# Altium PCB GLCD-ENCODER.PcbDoc
Units mm, origin at the board's own origin, x right, y up, seen from the top; angles counter-clockwise.
Board outline 112.6 x 71.2 mm, 2 copper layers (Top Layer, Bottom Layer); 47 components, 41 nets, 180 pads, 16 vias.
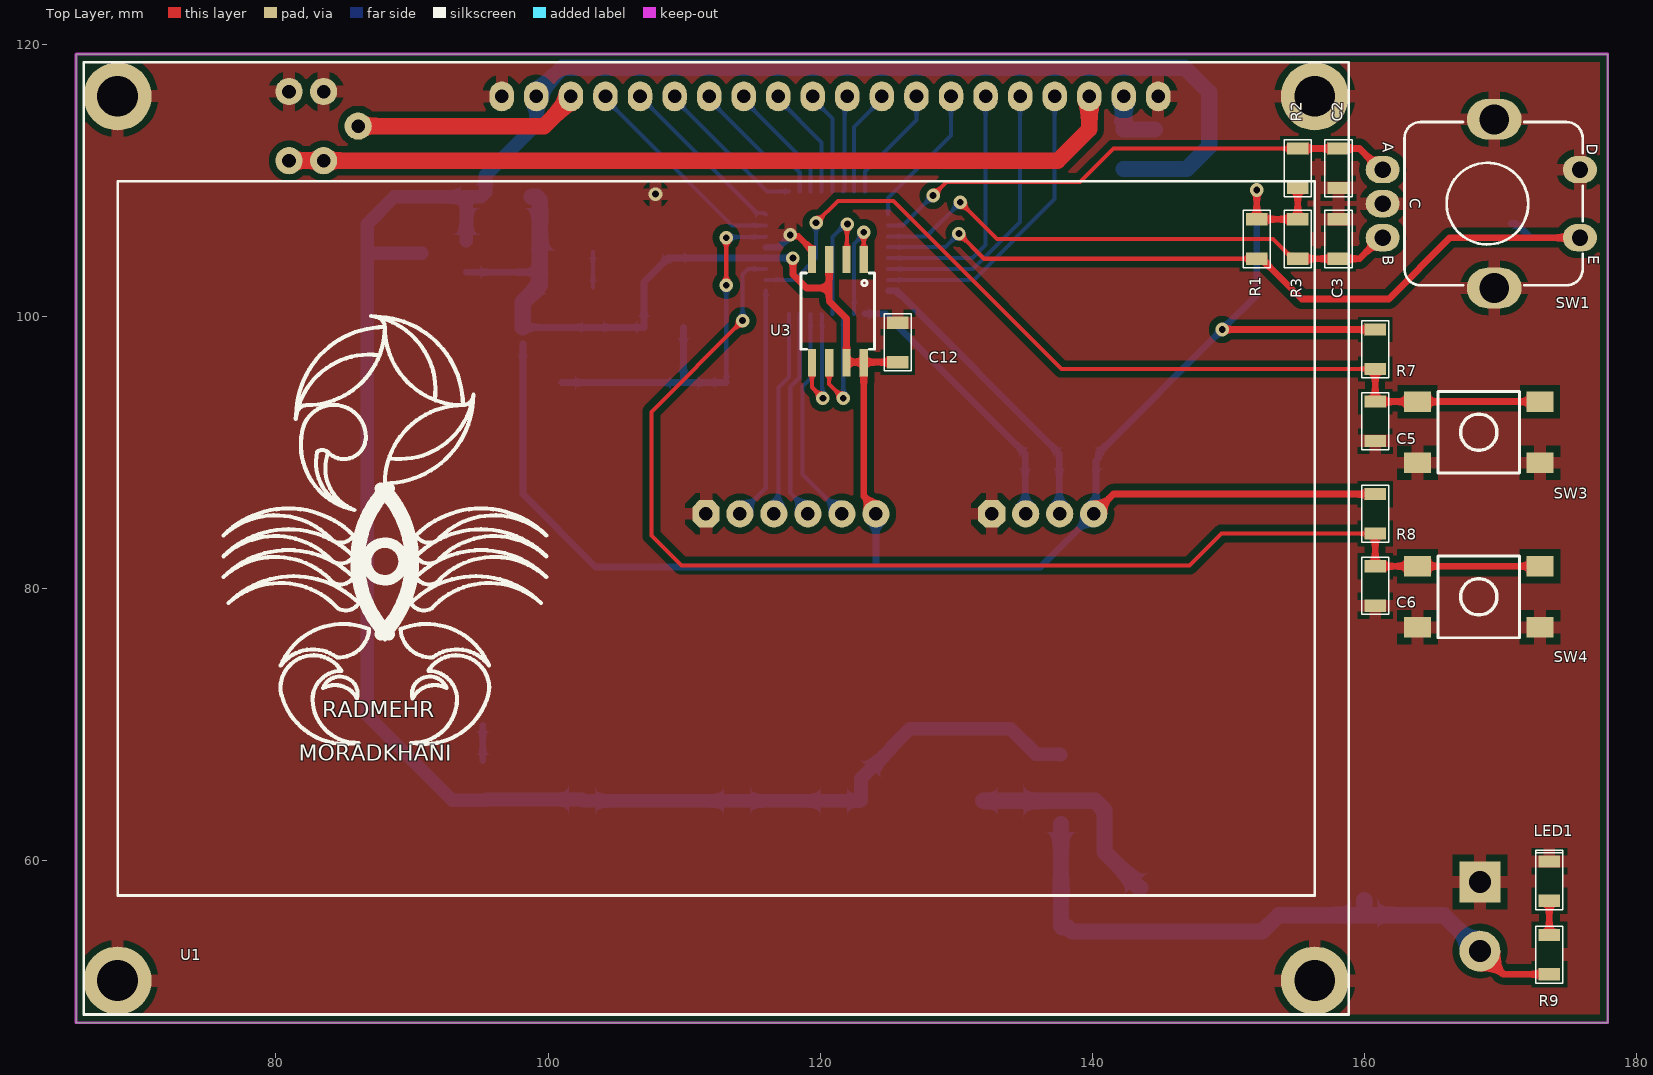
[diagram p0: Top Layer view]
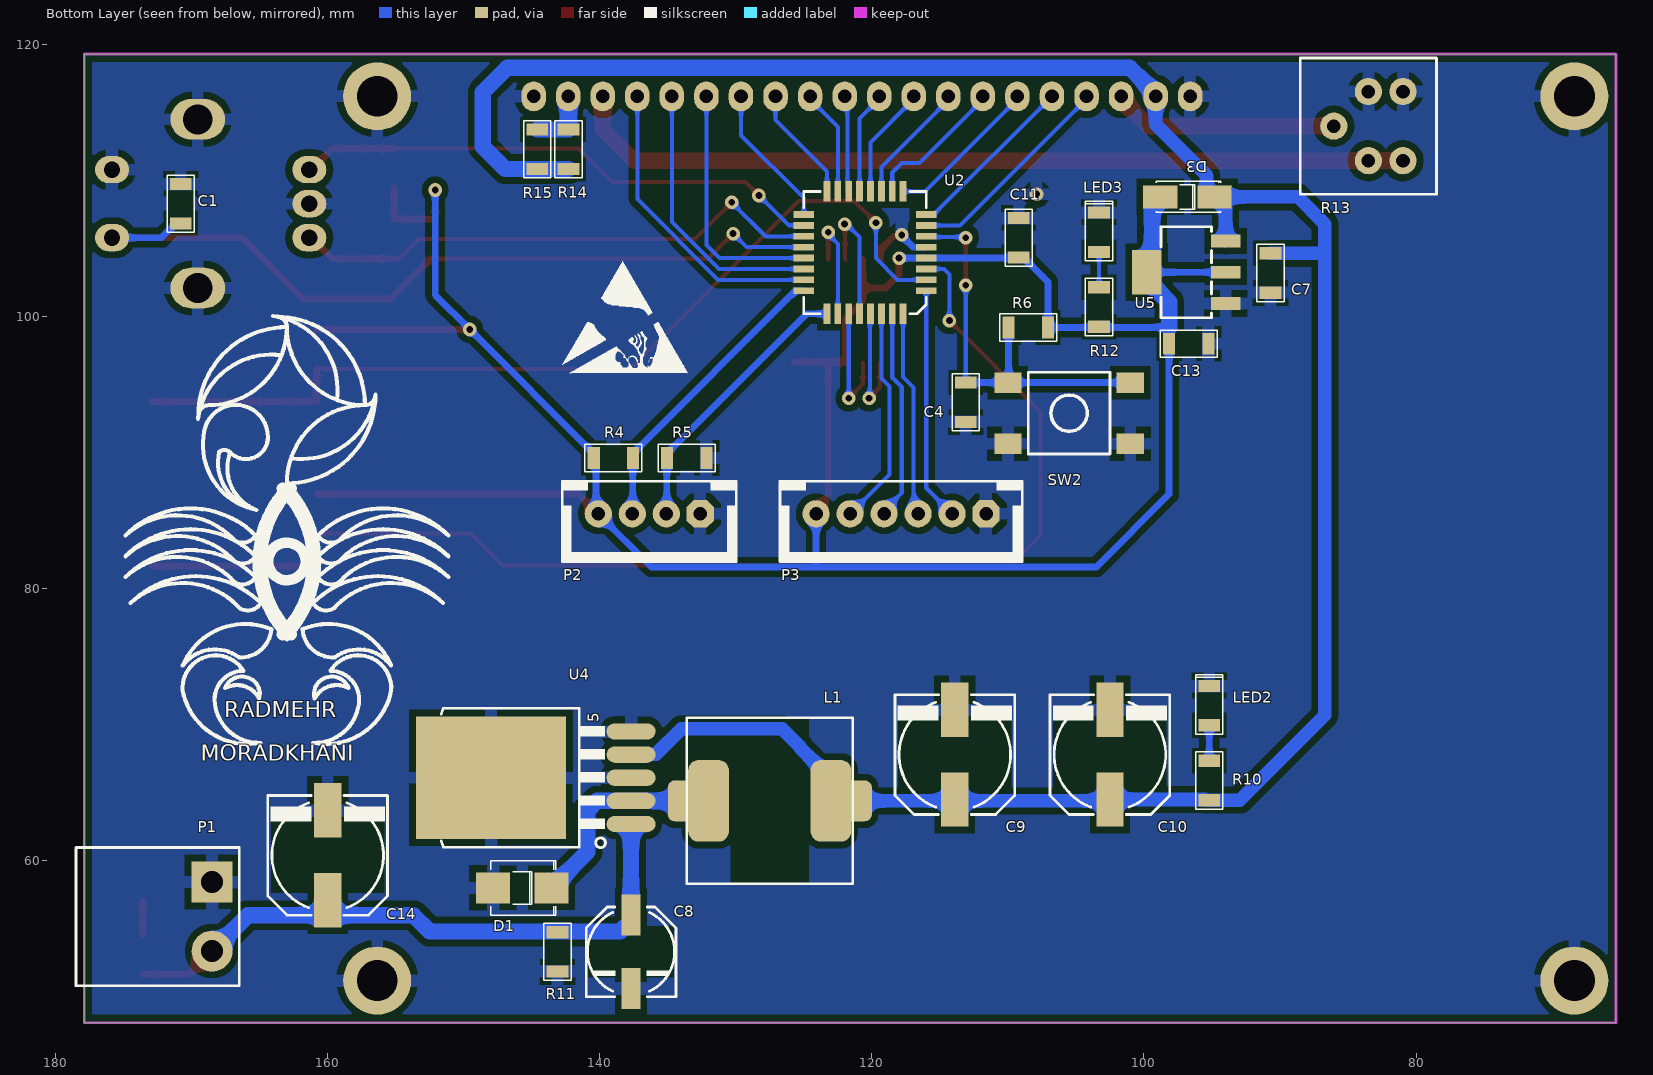
[diagram p1: Bottom Layer view, seen from below]
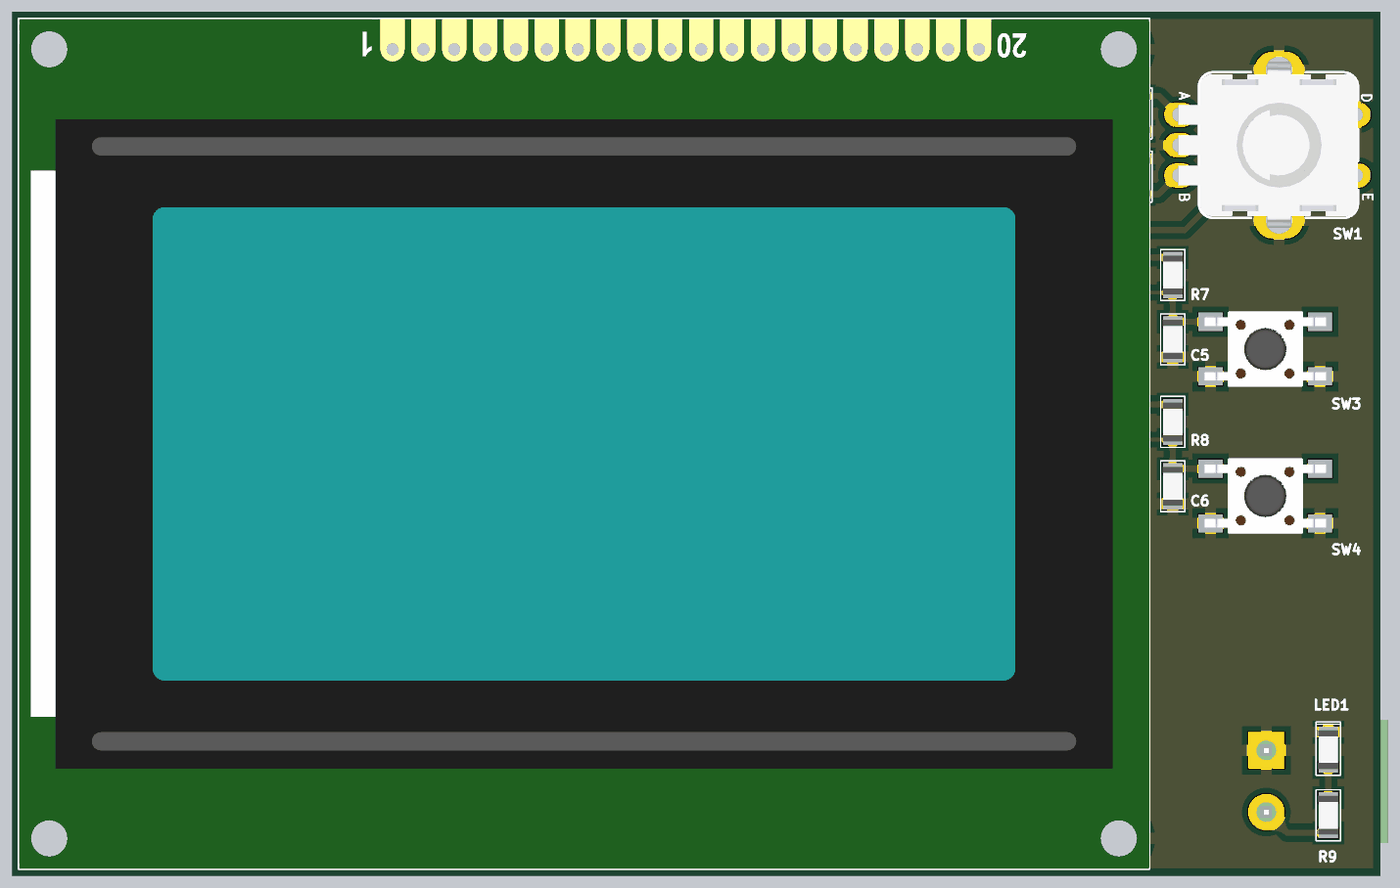
[diagram p2: 3D render of the assembled board from above, using the file's embedded part models]
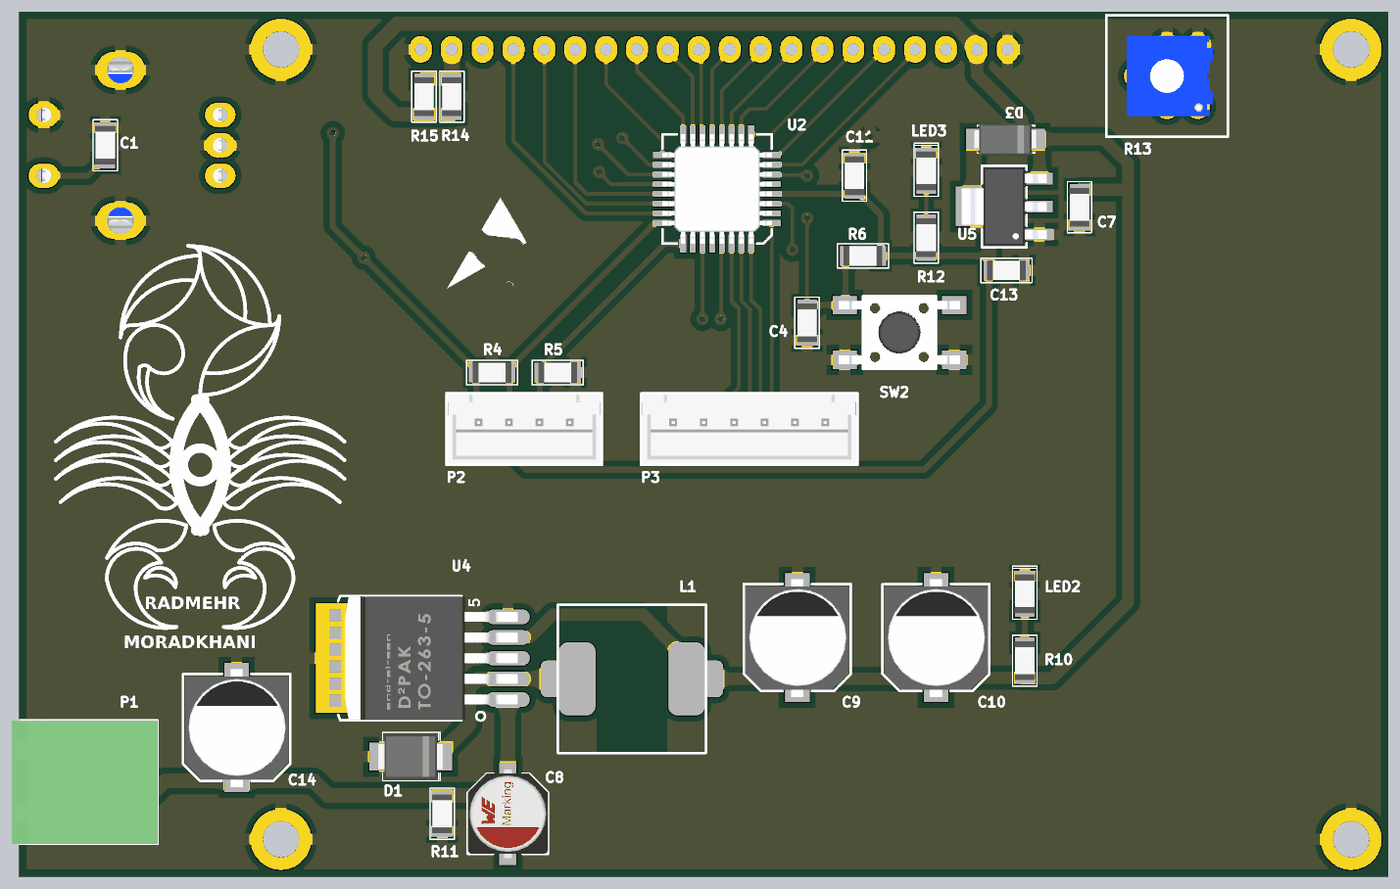
[diagram p3: 3D render of the assembled board from below, using the file's embedded part models]

## Layer stack, top to bottom
Top Solder: solder mask 0.0102, Solder Resist, Dk 3.5
Top Layer: signal copper 0.0356
Dielectric 1: dielectric 0.32, FR-4, Dk 4.8
Bottom Layer: signal copper 0.0356
Bottom Solder: solder mask 0.0102, Solder Resist, Dk 3.5

## Board outline
65.3,48.1 65.3,119.3 177.9,119.3 177.9,48.1

## Design rules (kind name [scope] priority, off if disabled: settings)
Clearance "Stitching GND" [IsStitchingVia and InNet('GND') vs (IsVia and (Not IsStitchingVia)) Or IsPad] p1: gap=0.127 ignorepadtopadclearanceinfootprint=FALSE
Clearance [All] p2: gap=0.3 ignorepadtopadclearanceinfootprint=FALSE except(0: Arc-Hole Track-Hole SMDPad-Hole THPad-Hole Via-Hole Fill-Hole Poly-Hole Region-Hole Text-Hole; 0.5: Arc-Poly Track-Poly SMDPad-Poly THPad-Poly Via-Poly Fill-Poly Poly-Poly)
PlaneClearance [All] p1: clearance=0.5
PlaneConnect [All] p1: planeconnectstyle=Relief reliefexpansion=0.9 reliefentries=4 reliefconductorwidth=0.9 reliefairgap=0.5
PolygonConnect [All] p1: connectstyle=Relief reliefconductorwidth=0.9 reliefentries=4 polygonreliefangle="90 Angle" airgapwidth=0.5
RoutingVias [All] p1: holewidth=0.5 width=1 viastyle="Through Hole" minholewidth=0.5 minwidth=1 maxholewidth=0.5 maxwidth=1
SolderMaskExpansion [All] p1: expansion=0.102 istentingtop=FALSE
Width [All] p1: maxlimit=1.2 minlimit=0.3 preferedwidth=0.5 minimp=50.000000 maximp=50.000000 favimp=50.000000
28 further rules are at their usual default settings.

## Components (designator, comment, footprint, x,y, rotation, side; value= is the part's Value field where it differs from the comment)
C1 "CAP_SMD" "C 1206" 170.8,108.3 r270 bottom
C2 "CAP_SMD" "C 1206" 158.1,110.9 r90 top
C3 "CAP_SMD" "C 1206" 158.1,105.7 r270 top
C4 "CAP_SMD" "C 1206" 113.1,93.7 r90 bottom
C5 "CAP_SMD" "C 1206" 160.8,92.3 r90 top
C6 "CAP_SMD" "C 1206" 160.8,80.2 r90 top
C7 "CAP_SMD" "C 1206" 90.7,103.2 r90 bottom
C8 "CAP_POL" CAP_EL_100uF 137.7,53.3 r270 bottom
C9 "CAP_POL" CAP_EL_470uF 113.9,67.8 r90 bottom
C10 "CAP_POL" CAP_EL_470uF 102.5,67.8 r90 bottom
C11 "CAP_SMD" "C 1206" 109.2,105.8 r270 bottom
C12 "CAP_SMD" "C 1206" 125.7,98.1 r270 top
C13 "CAP_SMD" "C 1206" 96.7,98 r0 bottom
C14 "CAP_POL" CAP_EL_470uF 160,60.4 r90 bottom
D1 "DIOD_SMD" DIOD_SMB 145.7,58 r180 bottom
D3 "DIOD_SMD" DIOD_SMA 96.8,108.8 r180 bottom
L1 "Inductor" L_12*12_SMD 127.5,64.4 r180 bottom
LED1 "LED_SMD" "D 1206" 173.6,58.5 r90 top
LED2 "LED_SMD" "D 1206" 95.2,71.4 r90 bottom
LED3 "LED_SMD" "D 1206" 103.3,106.2 r90 bottom
P1 "POENIX" POENIX_R_2pin 168.5,55.9 r270 bottom
P2 "HHDR_4" XH_4 136.36,85.5 r0 bottom
P3 "XH_6" XH_6 117.85,85.5 r0 bottom
R1 "RES_SMD" "R 1206" 152.1,105.7 r270 top
R2 "RES_SMD" "R 1206" 155.1,110.9 r90 top
R3 "RES_SMD" "R 1206" 155.1,105.7 r270 top
R4 "RES_SMD" "R 1206" 139,89.6 r0 bottom
R5 "RES_SMD" "R 1206" 133.6,89.6 r0 bottom
R6 "RES_SMD" "R 1206" 108.5,99.2 r180 bottom
R7 "RES_SMD" "R 1206" 160.8,97.6 r90 top
R8 "RES_SMD" "R 1206" 160.8,85.5 r90 top
R9 "RES_SMD" "R 1206" 173.6,53.1 r90 top
R10 "RES_SMD" "R 1206" 95.2,65.9 r270 bottom
R11 "RES_SMD" "R 1206" 143.1,53.3 r90 bottom
R12 "RES_SMD" "R 1206" 103.3,100.7 r270 bottom
R13 "POT" POT_DIP_GFP_1&2 83.5,114 r90 bottom
R14 "RES_SMD" "R 1206" 142.3,112.3 r90 bottom
R15 "RES_SMD" "R 1206" 144.6,112.3 r90 bottom
SW1 "Rotary_Encoder" Rotary_Encoder 168.6,108.3 r0 top
SW2 "SWITCH" SOP4 105.5,92.9 r0 bottom
SW3 "SWITCH" SOP4 168.415,91.5 r180 top
SW4 "SWITCH" SOP4 168.415,79.4 r180 top
U1 "KS0108-128*64" KS0108-128*64_Module 156.36,116.19 r90 top locked
U2 "STM32G030K6" LQFP32 120.5,104.7 r0 bottom
U3 "W25QXXX" SOIC-8-WIDE 121.3,100.4 r270 top
U4 "LM2576" TO-263-5-SMD 137.7,66.1 r90 bottom
U5 "AMS1117" SOT-223 96.89,103.26 r90 bottom

## Footprints (in the part's own frame and the unit in brackets; to place one, negate y for a bottom-side part, rotate by r counter-clockwise, add the part's x,y. Pads: shape width x height; smd on the part's side, far side on the other; paste and mask are expansions set on the pad)
"C 1206" [mm] "C?"
  rect 0.9x1.6 smd: 1(-1.45,0) 2(1.45,0)
  Top Layer pour cut-out: -0.9,0.95 0.9,0.95 0.9,-0.95 -0.9,-0.95
  silkscreen extent -2.1,-1 2.1,1, body extent -1.6,-0.83 1.6,0.83, height 0.57
CAP_EL_100uF [mm] "C?"
  rect 3x1.4 smd: 1(2.7,0) 2(-2.7,0)
  Top Layer pour cut-out: 1.905,3.175 1.905,-3.175 -1.905,-3.175 -1.905,3.175
  silkscreen extent -3.3,-3.3 3.3,3.3, body extent -3.65,-3.3 3.65,3.3, height 5.8
CAP_EL_470uF [mm] "C?"
  rect 4x2 smd: 1(3.3,0) 2(-3.3,0)
  Top Layer pour cut-out: 2.794,4.191 2.794,-4.191 -2.794,-4.191 -2.794,4.191
  silkscreen extent -4.4,-4.4 4.4,4.4, body extent -4.9,-4.25 4.8,4.25, height 10.3
"D 1206" [mm] "D?"
  rect 0.9x1.6 smd: 1(-1.45,0) 2(1.45,0)
  Top Layer pour cut-out: -0.9,0.95 0.9,0.95 0.9,-0.95 -0.9,-0.95
  silkscreen extent -2.1,-1 2.28,1, body extent -1.6,-0.83 1.6,0.83, height 0.57
DIOD_SMA [mm] "D?"
  rect 2.5x1.7 smd: 1(-2,0) 2(2,0)
  Top Layer pour cut-out: -0.65,0.95 0.65,0.95 0.65,-0.95 -0.65,-0.95
  silkscreen extent -2.3,-1.15 2.45,1.15, body extent -2.6,-1.3 2.6,1.3, height 2.42
DIOD_SMB [mm] "D?"
  rect 2.5x2.3 smd: 1(-2.15,0) 2(2.15,0)
  Top Layer pour cut-out: -0.8,1.25 0.8,1.25 0.8,-1.25 -0.8,-1.25
  silkscreen extent -2.3,-2 2.45,2, body extent -2.7,-1.8 2.7,1.8, height 2.32
KS0108-128*64_Module [mm] "U?"
  oval 2.2x1.8 hole 1: 1(0,59.76) 2(0,57.22) 3(0,54.68) 4(0,52.14) 5(0,49.6) 6(0,47.06) 7(0,44.52) 8(0,41.98) 9(0,39.44) 10(0,36.9) 11(0,34.36) 12(0,31.82) 13(0,29.28) 14(0,26.74) 15(0,24.2) 16(0,21.66) 17(0,19.12) 18(0,16.58) 19(0,14.04) 20(0,11.5)
  round 5 hole 3: 21(0,0) 22(-65,0) 23(-65,88) 24(0,88)
  silkscreen extent -67.5,-2.5 2.5,90.5, body extent -67.5,-2.5 2.5,90.5, height 20.6
L_12*12_SMD [mm] "L?"
  rrect50% 2x3 smd: 1(-6.5,0) 2(6.5,0)
  rrect50% 3x6 smd: 1(-4.5,0) 2(4.5,0)
  Top Layer pour cut-out: -2.9,6.2 2.9,6.2 2.9,-6.2 -2.9,-6.2
  silkscreen extent -6.1,-6.1 6.1,6.1
LQFP32 [mm] "U?"
  rect 1.5x0.5 smd mask+0.06: 1(-4.5,2.8) 2(-4.5,2) 3(-4.5,1.2) 4(-4.5,0.4) 5(-4.5,-0.4) 6(-4.5,-1.2) 7(-4.5,-2) 8(-4.5,-2.8) 17(4.5,-2.8) 18(4.5,-2) 19(4.5,-1.2) 20(4.5,-0.4) 21(4.5,0.4) 22(4.5,1.2) 23(4.5,2) 24(4.5,2.8)
  rect 0.5x1.5 smd mask+0.06: 9(-2.8,-4.5) 10(-2,-4.5) 11(-1.2,-4.5) 12(-0.4,-4.5) 13(0.4,-4.5) 14(1.2,-4.5) 15(2,-4.5) 16(2.8,-4.5) 25(2.8,4.5) 26(2,4.5) 27(1.2,4.5) 28(0.4,4.5) 29(-0.4,4.5) 30(-1.2,4.5) 31(-2,4.5) 32(-2.8,4.5)
  silkscreen extent -4.5,-4.5 4.5,4.5, body extent -4.5,-4.5 4.5,4.5, height 1.6
POENIX_R_2pin [mm] "P?"
  rect 3x3 hole 1.6: 1(-2.54,0)
  round 3 hole 1.6: 2(2.54,0)
  silkscreen extent -5.08,-10 5.08,2, body extent -5.08,-10 5.08,2, height 8.55
POT_DIP_GFP_1&2 [mm] "R?"
  round 2 hole 1: 1(-2.54,-2.54) 1(-2.54,0) 2(0,2.54) 3(2.54,-2.54) 3(2.54,0)
  silkscreen extent -5,-5 5,5, body extent -3.3,-3.75 3.3,3.3, height 4.7
"R 1206" [mm] "R?"
  rect 0.9x1.6 smd: 1(-1.45,0) 2(1.45,0)
  Top Layer pour cut-out: -0.9,0.95 0.9,0.95 0.9,-0.95 -0.9,-0.95
  silkscreen extent -2.1,-1 2.1,1, body extent -1.6,-0.83 1.6,0.83, height 0.57
Rotary_Encoder [mm] "SW?"
  oval 2.5x2 hole 1.2: 1(-7.25,2.5) 2(-7.25,0) 3(-7.25,-2.5) 4(7.25,-2.5) 5(7.25,2.5)
  oval 4x3 hole 2.2: 6(0.95,6.2)
  oval 4x3 hole 2.2 unplated: 7(0.95,-6.2)
  silkscreen extent -5.65,-6 7.45,6, body extent -7.38,-6.81 7.45,6.84, height 21.2
SOIC-8-WIDE [mm] "U?"
  rect 2x0.6 smd: 1(-3.8,1.905) 2(-3.8,0.635) 3(-3.8,-0.635) 4(-3.8,-1.905) 5(3.8,-1.905) 6(3.8,-0.635) 7(3.8,0.635) 8(3.8,1.905)
  silkscreen extent -2.8,-2.7 2.8,2.7, body extent -4.05,-2.73 4.05,2.73, height 1.75
SOP4 [mm] "S?"
  rect 2x1.5 smd: 1(-4.5,2.25) 2(-4.5,-2.25) 3(4.5,-2.25) 4(4.5,2.25)
  silkscreen extent -3,-3 3,3, body extent -5,-3 5,3, height 7.27
SOT-223 [mm] "U?"
  rect 0.95x2.15 smd: 1(-2.3,-2.9) 2(0,-2.9) 3(2.3,-2.9)
  rect 3.255x2.15 smd: 4(0,2.9)
  silkscreen extent -3.35,-1.85 3.35,1.85, body extent -3.25,-3.5 3.25,3.5, height 1.8
TO-263-5-SMD [mm] "U?"
  oval 1.2x3.6 smd: 1(-3.404,0) 2(-1.702,0) 3(0,0) 4(1.702,0) 5(3.404,0)
  rect 9x11 smd paste-6: 6(0,10.3)
  silkscreen extent -5.14,1.88 5.1,13.96, body extent -5.08,-0.84 5.08,13.39, height 4.87
XH_4 [mm] "PW10-xx-M, JST-BxB-XH-A pitch: 2.5mm"
  oct 2x2 hole 1: 1(-3.75,0)
  round 2 hole 1: 2(-1.25,0) 3(1.25,0) 4(3.75,0)
  silkscreen extent -6.4,-2.4 6.4,3.5, body extent -6.25,-2.3 6.25,3.4, height 7
XH_6 [mm] "PW10-xx-M, JST-BxB-XH-A pitch: 2.5mm"
  oct 2x2 hole 1: 1(-6.25,0)
  round 2 hole 1: 2(-3.75,0) 3(-1.25,0) 4(1.25,0) 5(3.75,0) 6(6.25,0)
  silkscreen extent -8.9,-2.4 8.9,3.5, body extent -8.75,-2.3 8.75,3.4, height 7

## Part data
P1: library part POENIX_2PIN_5.08mm_1
P2: library part XH_4, "JST-XH pitch: 2.5mm"
P3: "JST-XH pitch: 2.5mm", MANF=JST, MANF_P#=JST-S6B-XHA
R13: library part POTENTIOMETR

## Via types
v1: diameter 1, hole 0.5, Top Layer to Bottom Layer, tented both sides, 16 vias

## Nets (pads, with @x,y where several pads share a name; then routed paths per layer and width w, separated by ;. In a path a pad name is that pad's centre, name@x,y a point inside that pad or via, vN(x,y) a via of type N, cw(c..) or ccw(c..) an arc to the next point about the centre after c; other vN are vias at no path point)
+3.3V: C11.2 C12.2 C13.2 D3.1 P2.4 P3.6 R1.1 R2.1 R3.1 R4.2 R6.2 R7.2 R8.2 R12.2 U2.4 U3.3 U3.7 U3.8 U5.2 U5.4 | length 197.6
  Top Layer w0.5: v1(118,104.3) 118,103.093 118.993,102.1 120.665,102.1 ; U3.3 120.665,102.1 ; P3.6 124.1,85.906 123.205,86.801 U3.8 U3.8@123.255,96.65 ; C12.2 U3.8@123.255,96.65 ; P2.4 141.56,86.95 R8.2 ; v1(149.55,99.05) R7.2 ; v1(152.1,109.3) R1.1 R3.1 R2.1 ; 120.665,102.1 120.665,101.135 121.935,99.865 U3.7 121.985,96.65 U3.8@123.255,96.65
  Bottom Layer w0.5: U5.2 99.4,103.26 U5.4 ; C13.2 98.15,86.943 103.493,81.6 136.21,81.6 P2.4 140.28,85.67 140.28,89.43 R4.2 140.45,89.95 v1(149.55,99.05) ; 98.15,99.2 R6.2 107.05,102.55 108.8,104.3 U2.4 v1(118,104.3) ; 124.1,81.7 P3.6 P3.6@124.1,85.6 ; v1@149.5,99.1 v1(149.55,99.05) ; v1(152.1,109.3) 152.1,101.6 v1(149.55,99.05)
  Bottom Layer w1.2: 98.15,99.2 98.15,101.068 99.4,102.317 99.4,103.26 99.4,108.55 99.15,108.8 D3.1
+5V: C7.2 C9.2 C10.2 D3.2 L1.2 R10.2 R14.1 R15.1 U1.2 U4.4 U5.3 | length 181.7
  Bottom Layer w1: C7.2 87.05,104.65 86.7,104.3 ; U5.3 93.99,108.39 D3.2@94.4,108.8 ; U1.2 99.14,114.14 95.411,110.411 95.411,109.15 95.061,108.8 D3.2@94.4,108.8 ; U4.4 137.662,67.84 135.86,67.84 134,69.7 126.6,69.7 125.26,68.36 125.26,68.295 123,66.035 123,64.4 121,64.4 102.6,64.4 C10.2 95.5,64.5 95.45,64.45 R10.2 92.95,64.45 86.7,70.7 86.7,104.3 ; 86.7,104.3 86.7,106.8 88.7,108.8 D3.2@94.4,108.8
  Bottom Layer w1.2: U1.2 99.333,116.383 99.333,116.589 101.044,118.3 146.8,118.3 148.6,116.5 148.6,112.5 146.95,110.85 R14.1
CS1: U1.15 U2.21 | length 18.5
  Bottom Layer w0.3: U2.21 131.2,104.3 132.16,105.26 U1.15
CS2: U1.16 U2.22 | length 20.4
  Bottom Layer w0.3: U2.22 131.249,103.5 134.7,106.951 U1.16
D0: U1.7 U2.10 | length 10.5
  Bottom Layer w0.3: U1.7 111.84,115.96 116.5,111.3 117.8,111.3 118.5,110.6 U2.10
D1: U1.8 U2.11 | length 9
  Bottom Layer w0.3: U1.8 114.38,115.92 119.3,111 U2.11
D2: U1.9 U2.12 | length 8.3
  Bottom Layer w0.3: U1.9 116.92,115.99 120.1,112.81 U2.12
D3: U1.10 U2.13 | length 7.6
  Bottom Layer w0.3: U1.10 119.46,115.99 120.9,114.55 U2.13
D4: U1.11 U2.14 | length 7.1
  Bottom Layer w0.3: U2.14 121.8,109.3 121.8,115.99 U1.11
D5: U1.12 U2.15 | length 7.8
  Bottom Layer w0.3: U2.15 122.5,113.95 124.54,115.99 U1.12
D6: U1.13 U2.16 | length 8.6
  Bottom Layer w0.3: U2.16 123.3,110.659 127.08,114.439 U1.13
D7: U1.14 U2.17 | length 10.6
  Bottom Layer w0.3: U2.17 125,108.7 129.62,113.32 U1.14
EN: U1.6 U2.9 | length 11.4
  Bottom Layer w0.3: U1.6 109.3,115.99 116.09,109.2 U2.9
GND: C1.1 C2.1 C3.1 C4.1 C5.1 C6.1 C7.1 C8.1 C9.1 C10.1 C11.1 C12.1 C13.1 C14.1 D1.1 LED1.2 LED2.2 LED3.2 P1.1 P2.1 P3.1 R5.1 R11.1 R13.3 SW1.2 SW1.5 SW1.6 SW1.7 SW2.1 SW2.4 SW3.1 SW3.4 SW4.1 SW4.4 U1.1 U1.20 U1.21 U1.22 U1.23 U1.24 U2.5 U3.4 U4.3 U4.5 U4.6 U5.1 | length 5
  Top Layer w0.5: v1(117.8,106) 117.896,105.904 118.391,105.904 119.395,104.9 U3.4
  Bottom Layer w0.5: U2.5 116.978,105.1 117.8,105.922 v1(117.8,106)
  other v1: 107.9,109
NetC8_2: C8.2 C14.2 P1.2 R9.1 R11.2 U4.1 | length 46.5
  Top Layer w0.5: P1.2 170.21,51.65 R9.1
  Bottom Layer w1.2: C8.2 137.7,55.2 137.8,55.1 138.203,55.1 138.503,54.8 143.1,54.8 152.5,54.8 153.7,56 165.86,56 P1.2 ; C8.2@137.7,56.2 U4.1 ; C14.2@160,56.3 C14.2
NetD1_2: D1.2 L1.1 U4.2 | length 16
  Bottom Layer w1.2: L1.1@132,64.4 132.002,64.398 134,64.398 U4.2 140.197,64.398 140.9,63.695 140.9,60.65 142.9,58.65 142.9,58.55 143.45,58 D1.2
NetLED1_1: LED1.1 R9.2 | length 2.5
  Top Layer w0.5: R9.2 LED1.1
NetLED2_1: LED2.1 R10.1 | length 2.6
  Bottom Layer w0.5: R10.1 LED2.1
NetLED3_1: LED3.1 R12.1 | length 2.6
  Bottom Layer w0.3: R12.1 LED3.1
NetR13_1: R13.1 U1.18 | length 62.2
  Top Layer w1.2: R13.1@80.96,111.46 83.5,111.46 137.46,111.46 139.78,113.78 U1.18
NetR13_2: R13.2 U1.3 | length 16.7
  Top Layer w1.2: R13.2 99.696,114 101.68,115.984 U1.3
NetR14_2: R14.2 R15.2 U1.19 | length 4.7
  Bottom Layer w1.2: U1.19 142.31,116.18 142.31,113.76 R14.2 R15.2
NRST: C4.2 R6.1 SW2.2 SW2.3 U2.6 | length 29.8
  Top Layer w0.3: v1(113.1,102.3) v1(113.1,105.8)
  Bottom Layer w0.3: C4.2 v1(113.1,102.3) ; v1(113.1,105.8) 113.15,105.85 115.95,105.85 U2.6
  Bottom Layer w0.5: SW2.2 SW2.3 ; R6.1 109.95,95.2 SW2.3 ; C4.2 SW2.3
RS: U1.4 U2.7 | length 15.8
  Bottom Layer w0.3: U1.4 104.22,115.99 113.51,106.7 U2.7
RST_LCD: U1.17 U2.23 | length 22.2
  Bottom Layer w0.3: U2.23 131.297,102.7 137.24,108.643 U1.17
RW: U1.5 U2.8 | length 12.8
  Bottom Layer w0.3: U1.5 115.35,107.6 115.9,107.6 U2.8
SPI1_MISO: U2.28 U3.2 | length 9.8
  Top Layer w0.3: U3.2 121.968,104.232 121.968,106.768 v1(122,106.8)
  Bottom Layer w0.3: U2.28 120.9,105.857 121.843,106.8 v1(122,106.8)
SPI1_MOSI: U2.29 U3.5 | length 9.2
  Top Layer w0.3: U3.5 119.395,94.805 v1(120.2,94)
  Bottom Layer w0.3: U2.29 120.15,100.15 120.15,94.05 v1(120.2,94)
SPI1_NSS: U2.26 U3.1 | length 8.3
  Top Layer w0.3: v1(123.2,106.2) 123.203,106.197 123.203,104.202 U3.1
  Bottom Layer w0.3: U2.26 122.5,105.344 123.2,106.044 v1(123.2,106.2)
SPI1_SCK: U2.27 U3.6 | length 9.2
  Top Layer w0.3: U3.6 120.665,95.035 v1(121.7,94)
  Bottom Layer w0.3: v1(121.7,94) U2.27
SW1: C5.2 R7.1 SW3.2 SW3.3 U2.2 | length 68.4
  Top Layer w0.3: v1(119.7,106.9) 121.3,108.5 125.4,108.5 137.75,96.15 R7.1
  Top Layer w0.5: R7.1 C5.2 SW3.2
  Bottom Layer w0.3: U2.2 118.1,102.7 119.7,104.3 v1(119.7,106.9)
SW2: C6.2 R8.1 SW4.2 SW4.3 U2.3 | length 93.4
  Top Layer w0.3: v1(114.3,99.7) 107.6,93 107.6,83.9 109.8,81.7 147.15,81.7 149.5,84.05 R8.1
  Top Layer w0.5: R8.1 C6.2 SW4.3 SW4.2
  Bottom Layer w0.3: v1(114.3,99.7) 114.3,103.1 114.7,103.5 U2.3
SW_ENC: C1.2 R1.2 SW1.4 U2.20 | length 60.6
  Top Layer w0.3: v1(130.2,106.1) 132.05,104.25 R1.2
  Top Layer w0.5: R1.2 152.45,104.25 155.4,101.3 161.8,101.3 166.3,105.8 SW1.4
  Bottom Layer w0.3: U2.20 129.2,105.1 v1(130.2,106.1)
  Bottom Layer w0.5: C1.2 171.15,106.85 172.2,105.8 SW1.4
SWCLK: P2.2 R5.2 U2.25 | length 20.5
  Bottom Layer w0.5: U2.25 124.8,100.2 135.05,89.95 R5.2 135.08,89.57 135.08,85.53 P2.2
SWDIO: P2.3 R4.1 U2.24 | length 22
  Bottom Layer w0.5: U2.24 125.6,101.9 137.55,89.95 R4.1 137.58,89.57 137.58,85.53 P2.3
TIM1_CH1: C2.2 R2.2 SW1.1 U2.18 | length 39.3
  Top Layer w0.3: v1(128.3,108.9) 129.3,109.9 139.1,109.9 141.55,112.35 R2.2
  Top Layer w0.5: R2.2 C2.2 159.65,112.35 161.2,110.8 SW1.1
  Bottom Layer w0.3: U2.18 126.1,106.7 v1(128.3,108.9)
TIM1_CH2: C3.2 R3.2 SW1.3 U2.19 | length 39.7
  Top Layer w0.3: v1(130.3,108.4) 133,105.7 153.3,105.7 154.75,104.25 R3.2
  Top Layer w0.5: R3.2 C3.2 159.65,104.25 161.2,105.8 SW1.3
  Bottom Layer w0.3: U2.19 127.8,105.9 v1(130.3,108.4)
TIM16_CH1: P3.3 U2.32 | length 15.2
  Bottom Layer w0.3: P3.3 116.925,85.825 116.925,94.778 117.7,95.553 U2.32
TIM16_CH1N: P3.5 U2.30 | length 16.1
  Bottom Layer w0.3: U2.30 119.3,95.455 118.7,94.855 118.7,88.4 P3.5
TIM17_CH1: P3.2 U2.1 | length 17.2
  Bottom Layer w0.3: P3.2 116,87.4 U2.1
TIM17_CH1N: P3.4 U2.31 | length 15.5
  Bottom Layer w0.3: U2.31 118.5,95.504 117.8,94.804 117.8,87.051 119.1,85.751 P3.4

## Polygon pours and split planes (outlines as drawn)
GND on Top Layer "NONET_L-01_P-001" (solid, remove dead copper, pour order 1): 65.3,119.3 177.9,119.3 177.9,48.1 65.3,48.1
GND on Bottom Layer "NONET_L-01_P-001" (solid, remove dead copper, pour order 2): 65.3,119.3 177.9,119.3 177.9,48.1 65.3,48.1

## Keep-outs
Keep-Out Layer:
  the board outline again, w0.2

## Silkscreen, mask and mechanical layers (free items; w line width, h text height)
Top Overlay:
  circle w0.766: c88,82 r1.378
  lines w0.301: 81.454,92.486 cw(c86.853,91.759) 87.58,97.157 ; 83.835,90.005 ccw(c86.898,88.857) 85.749,85.794 ; 87,100.032 cw(c86.272,94.634) 91.671,93.906 ; 88.383,89.581 ccw(c89.11,94.98) 94.509,94.252 ; 85.749,85.794 cw(c86.706,90.58) 81.92,91.537 cw(c84.247,91.147) 86.606,91.169 cw(c84.992,91.141) 83.84,90.01 ccw(c83.416,89.617) 83.023,90.041 ccw(c86.509,89.28) 85.749,85.794 ; 88,87.743 ccw(c93.743,82) 88,76.257 ccw(c82.257,82) 88,87.743 ; 88,87.743 cw(c93.743,87.743) 93.743,93.487 ; 88,87.743 ccw(c88,94.252) 94.509,94.252 ; 88,99.23 ccw(c93.743,99.23) 93.743,93.486 ; 88,99.23 cw(c82.257,99.23) 82.257,93.487 ccw(c82.257,92.721) 81.491,92.721 cw(c88,92.721) 88,99.23 ; 88,99.23 ccw(c87.234,99.23) 87.234,99.996 cw(c87.234,93.487) 93.743,93.487 ; 93.743,93.486 ccw(c93.743,94.252) 94.509,94.252 ; 76.131,80.851 cw(c79.959,76.64) 84.171,80.468 ccw(c84.745,81.426) 85.703,80.851 ccw(c80.917,76.065) 76.131,80.851 ; 76.131,82.383 cw(c79.959,78.171) 84.171,82 ccw(c84.745,82.957) 85.703,82.383 ccw(c80.917,77.597) 76.131,82.383 ; 76.131,83.914 cw(c79.959,79.703) 84.171,83.532 ccw(c84.745,84.489) 85.703,83.914 ccw(c80.917,79.128) 76.131,83.914 ; 76.513,78.937 cw(c80.342,74.725) 84.554,78.554 ccw(c85.128,79.511) 86.086,78.937 ccw(c81.3,74.151) 76.514,78.937 ; 80.332,72.508 ccw(c85.12,73.455) 86.067,68.667 cw(c85.956,71.937) 82.686,71.826 cw(c84.812,71.836) 84.802,73.962 ccw(c82.747,72.68) 80.332,72.508 ; 80.342,74.342 cw(c82.716,72.581) 84.477,74.955 ccw(c84.631,77.176) 86.851,77.023 ccw(c84.937,72.428) 80.342,74.342 ; 83.469,72.697 cw(c84.332,71.074) 85.956,71.937 ccw(c84.778,72.278) 85.12,73.455 ccw(c84.674,72.251) 83.469,72.697 ; 89.149,77.023 cw(c91.063,72.428) 95.658,74.342 ccw(c93.284,72.581) 91.523,74.955 cw(c91.369,77.176) 89.149,77.023 ; 89.914,78.937 cw(c94.7,74.151) 99.486,78.937 ccw(c95.658,74.725) 91.446,78.554 cw(c90.872,79.511) 89.914,78.937 ; 89.933,68.667 ccw(c90.044,71.937) 93.314,71.826 ccw(c91.188,71.836) 91.198,73.962 cw(c93.253,72.68) 95.668,72.508 cw(c90.88,73.455) 89.933,68.667 ; 90.044,71.937 cw(c91.668,71.074) 92.531,72.697 ccw(c91.326,72.251) 90.88,73.455 ccw(c91.222,72.278) 90.044,71.937 ; 90.297,80.851 cw(c95.083,76.065) 99.869,80.851 ccw(c96.041,76.64) 91.829,80.468 cw(c91.255,81.426) 90.297,80.851 ; 90.297,82.383 cw(c95.083,77.597) 99.869,82.383 ccw(c96.041,78.171) 91.829,82 cw(c91.255,82.957) 90.297,82.383 ; 90.297,83.914 cw(c95.083,79.128) 99.869,83.914 ccw(c96.041,79.703) 91.829,83.532 cw(c91.255,84.489) 90.297,83.914
  lines w0.904: 87.694,76.64 ccw(c82.333,82) 87.694,87.36 ; 88.306,76.64 cw(c93.667,82) 88.306,87.36
  text "RADMEHR" at 83.395,70.15 h2
  text "MORADKHANI" at 81.684,66.936 h2
Bottom Overlay:
  drawing of 74 lines, arcs and shapes, not listed
  text "RADMEHR" at 167.605,70.15 h2
  text "MORADKHANI" at 169.316,66.936 h2

## Text inside footprints (layer, text, board x,y; h text height)
SW1: Top Overlay "E" at 176.45,104.5 h0.8 r270; Top Overlay "D" at 176.35,112.7 h0.8 r270; Top Overlay "C" at 163.35,108.7 h0.8 r270; Top Overlay "B" at 161.35,104.5 h0.8 r270; Top Overlay "A" at 161.35,112.8 h0.8 r270
U4: Bottom Overlay "5" at 140.067,70.189 h0.8 r270